# Altium PCB BGV1.0-pin.PcbDoc
Units mil, origin at the board's own origin, x right, y up, seen from the top; angles counter-clockwise.
Board outline 5620 x 4250 mil, 2 copper layers (Top Layer, Bottom Layer); 120 components, 16 nets, 420 pads, 408 vias.
Unrouted connection lines stored in the file: 80.
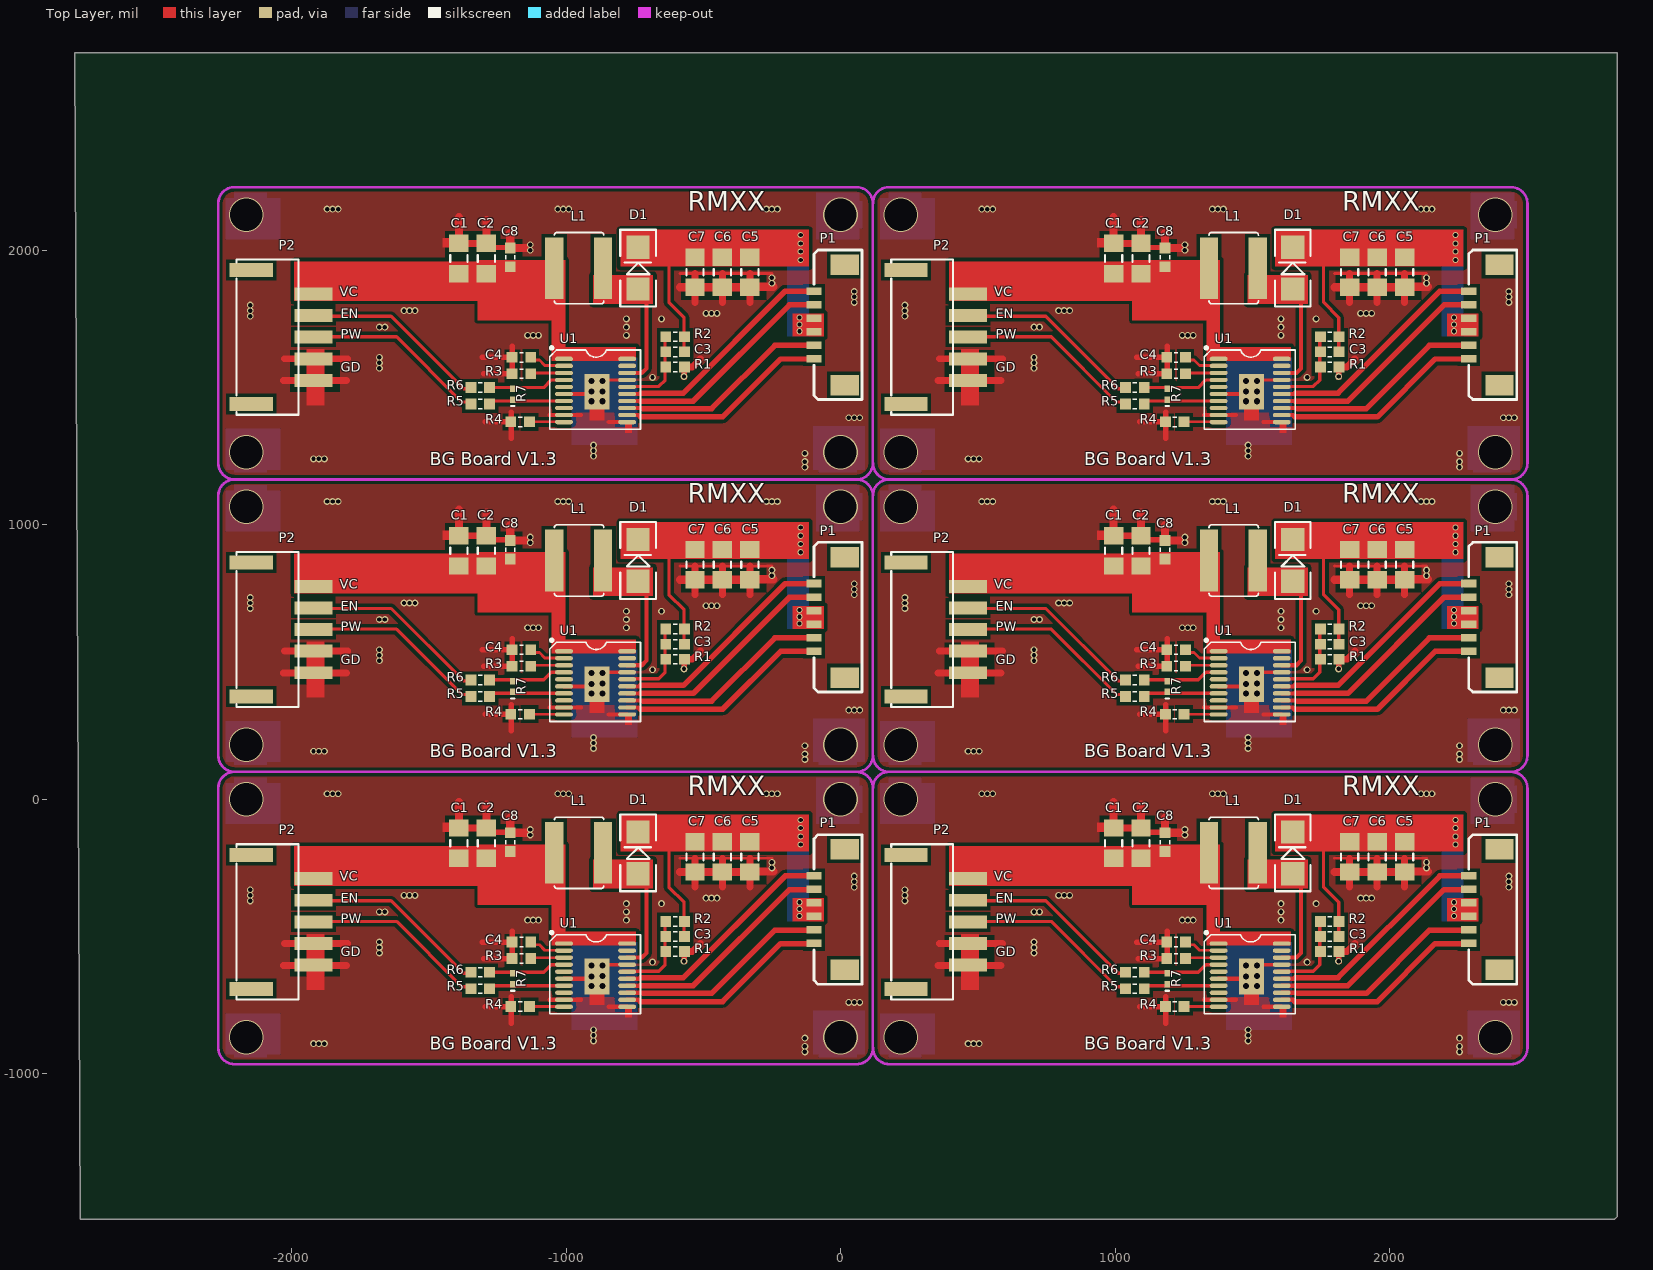
[diagram p0: Top Layer view]
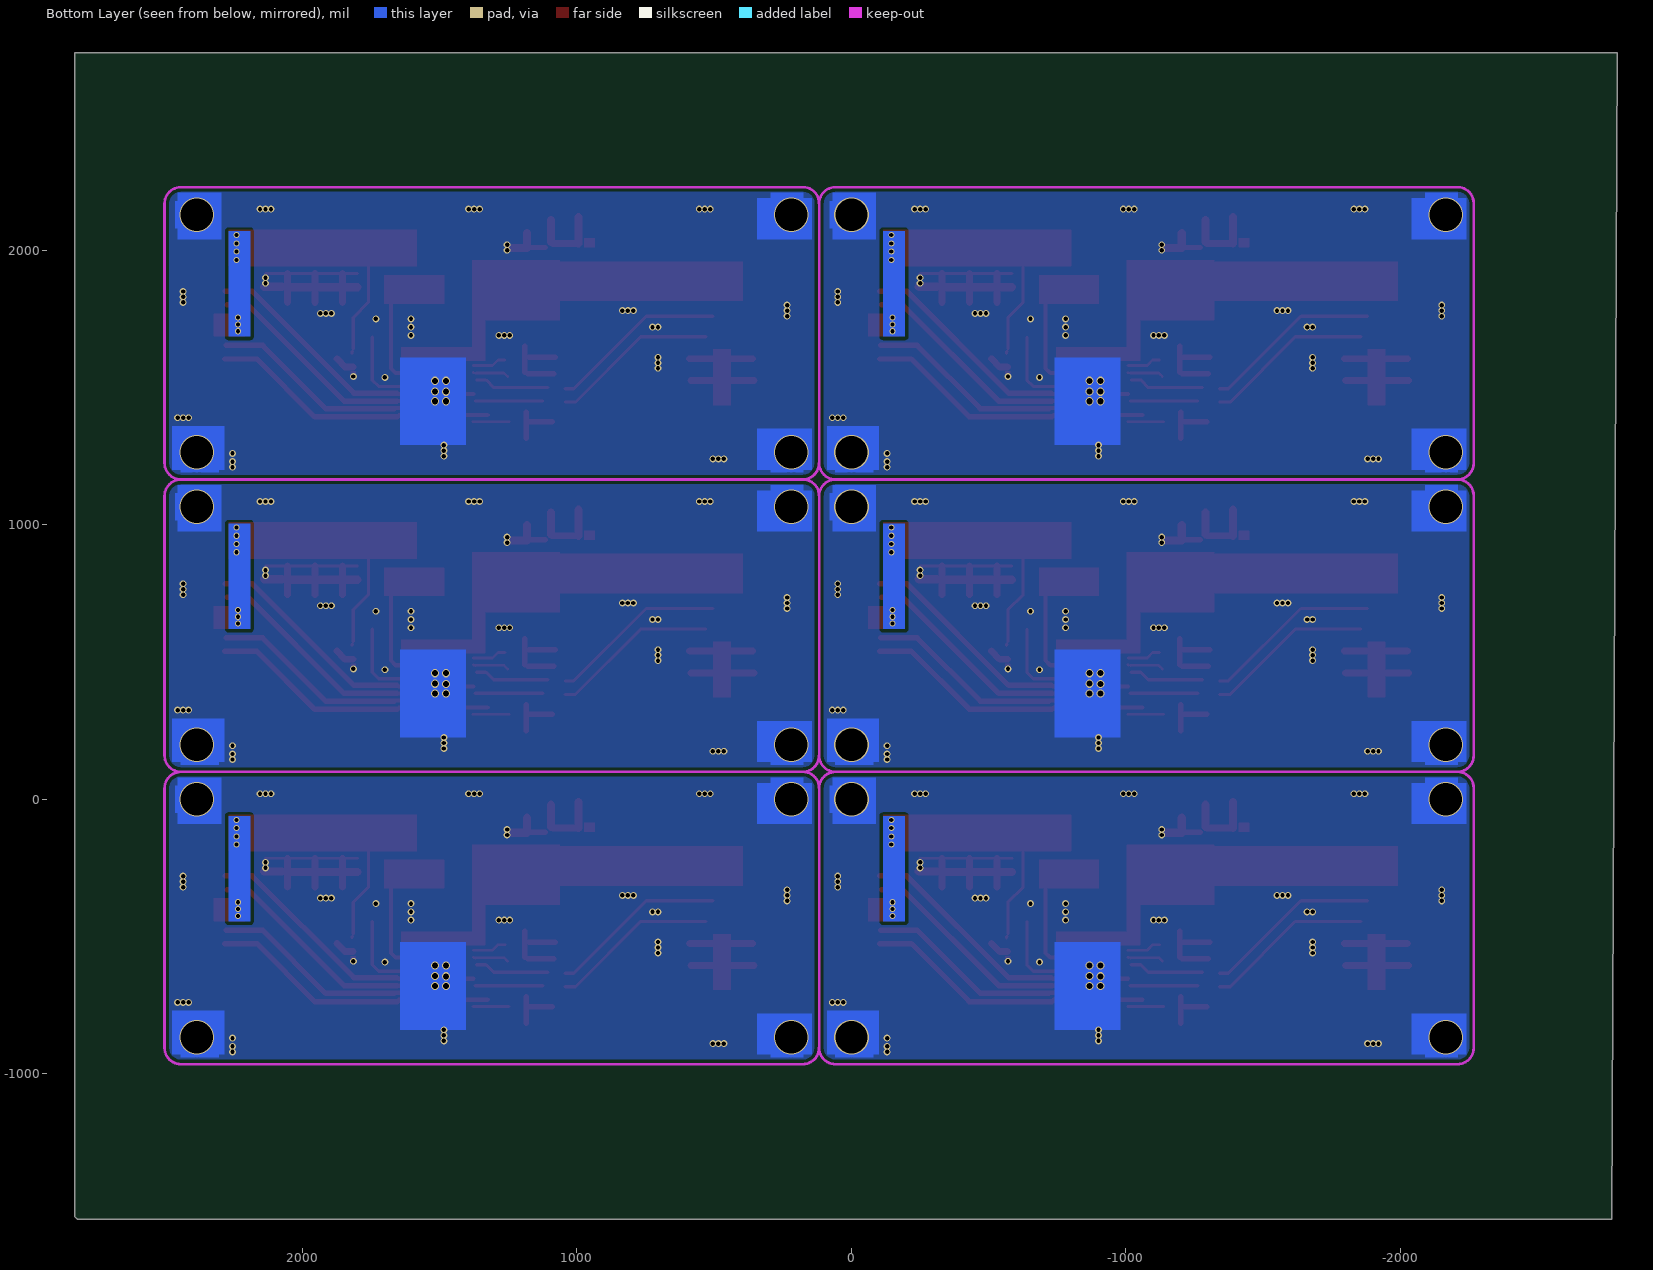
[diagram p1: Bottom Layer view, seen from below]

## Layer stack, top to bottom
Top Layer: signal copper 1.4
Dielectric: dielectric 12.6, FR-4, Dk 4.8
Bottom Layer: signal copper 1.4

## Board outline
-2790,2720 2830,2720 2830,-1520 2820,-1530 -2770,-1530

## Design rules (kind name [scope] priority, off if disabled: settings)
Clearance [All] p1 off: gap=12
ComponentClearance [All] p1: gap=5 collisioncheckmode=3 verticalgap=5
PolygonConnect [All] p1: connectstyle=Direct reliefconductorwidth=10 reliefentries=4 polygonreliefangle="90 Angle"
RoutingVias [All] p1: holewidth=12 width=22 viastyle="Through Hole" minholewidth=8 minwidth=10 maxholewidth=200 maxwidth=150
SolderMaskExpansion [All] p1: expansion=4
TestPointUsage [All] p1: valid=0 allowmultiple=FALSE
Testpoint [(IsPad And (OnTopLayer Or OnBottomLayer))] p1: side=3 testpointundercomponent=TRUE minsize=40 maxsize=100 preferedsize=60 minholesize=0 maxholesize=40 preferedholesize=32 testpointgrid=1 style=297 order=0-112345678
Width [All] p1: maxlimit=100 minlimit=10 preferedwidth=10 minimp=50.000000 maximp=50.000000 favimp=50.000000
18 further rules are at their usual default settings.

## Classes and differential pairs
component class BGV1.0: C1 C2 C3 C4 C5 C6 C7 C8 D1 L1 P1 P2 R1 R2 R3 R4 R5 R6 R7 U1

## Components (designator, comment, footprint, x,y, rotation, side; value= is the part's Value field where it differs from the comment)
C1 "Cap" 3216[1206] -1390,1970 r270 top
C1 "Cap" 3216[1206] 994.72,1970 r270 top
C1 "Cap" 3216[1206] -1390,905 r270 top
C1 "Cap" 3216[1206] 994.72,905 r270 top
C1 "Cap" 3216[1206] 994.72,-160 r270 top
C1 "Cap" 3216[1206] -1390,-160 r270 top
C2 "Cap" 3216[1206] -1290,1970 r270 top
C2 "Cap" 3216[1206] 1094.72,1970 r270 top
C2 "Cap" 3216[1206] -1290,905 r270 top
C2 "Cap" 3216[1206] 1094.72,905 r270 top
C2 "Cap" 3216[1206] 1094.72,-160 r270 top
C2 "Cap" 3216[1206] -1290,-160 r270 top
C3 "Cap" 0603 -602.28,1630 r0 top
C3 "Cap" 0603 1782.43,1630 r0 top
C3 "Cap" 0603 -602.28,565 r0 top
C3 "Cap" 0603 1782.43,565 r0 top
C3 "Cap" 0603 1782.43,-500 r0 top
C3 "Cap" 0603 -602.28,-500 r0 top
C4 "Cap" 0603 -1162.28,1610 r0 top
C4 "Cap" 0603 1222.43,1610 r0 top
C4 "Cap" 0603 -1162.28,545 r0 top
C4 "Cap" 0603 1222.43,545 r0 top
C4 "Cap" 0603 1222.43,-520 r0 top
C4 "Cap" 0603 -1162.28,-520 r0 top
C5 "Cap" 3216[1206] -330,1920 r90 top
C5 "Cap" 3216[1206] 2054.72,1920 r90 top
C5 "Cap" 3216[1206] -330,855 r90 top
C5 "Cap" 3216[1206] 2054.72,855 r90 top
C5 "Cap" 3216[1206] 2054.72,-210 r90 top
C5 "Cap" 3216[1206] -330,-210 r90 top
C6 "Cap" 3216[1206] -430,1920 r90 top
C6 "Cap" 3216[1206] 1954.72,1920 r90 top
C6 "Cap" 3216[1206] -430,855 r90 top
C6 "Cap" 3216[1206] 1954.72,855 r90 top
C6 "Cap" 3216[1206] 1954.72,-210 r90 top
C6 "Cap" 3216[1206] -430,-210 r90 top
C7 "Cap" 3216[1206] -530,1920 r90 top
C7 "Cap" 3216[1206] 1854.72,1920 r90 top
C7 "Cap" 3216[1206] -530,855 r90 top
C7 "Cap" 3216[1206] 1854.72,855 r90 top
C7 "Cap" 3216[1206] 1854.72,-210 r90 top
C7 "Cap" 3216[1206] -530,-210 r90 top
C8 "Cap" 0603 -1203,1974 r90 top
C8 "Cap" 0603 1181.72,1974 r90 top
C8 "Cap" 0603 -1203,909 r90 top
C8 "Cap" 0603 1181.72,909 r90 top
C8 "Cap" 0603 1181.72,-156 r90 top
C8 "Cap" 0603 -1203,-156 r90 top
D1 "Diode 1N4448" SMA -737.28,1935 r90 top
D1 "Diode 1N4448" SMA 1647.43,1935 r90 top
D1 "Diode 1N4448" SMA -737.28,870 r90 top
D1 "Diode 1N4448" SMA 1647.43,870 r90 top
D1 "Diode 1N4448" SMA 1647.43,-195 r90 top
D1 "Diode 1N4448" SMA -737.28,-195 r90 top
L1 "Inductor" L-6045 -1042.28,1935 r0 top
L1 "Inductor" L-6045 1342.43,1935 r0 top
L1 "Inductor" L-6045 -1042.28,870 r0 top
L1 "Inductor" L-6045 1342.43,870 r0 top
L1 "Inductor" L-6045 1342.43,-195 r0 top
L1 "Inductor" L-6045 -1042.28,-195 r0 top
P1 "Header 6" 1.25MM-6P -96.28,1851 r90 top
P1 "Header 6" 1.25MM-6P 2288.43,1851 r90 top
P1 "Header 6" 1.25MM-6P -96.28,786 r90 top
P1 "Header 6" 1.25MM-6P 2288.43,786 r90 top
P1 "Header 6" 1.25MM-6P 2288.43,-279 r90 top
P1 "Header 6" 1.25MM-6P -96.28,-279 r90 top
P2 "Header 5" PH2.0-5P-SMT -1920,1526 r90 top
P2 "Header 5" PH2.0-5P-SMT 464.72,1526 r90 top
P2 "Header 5" PH2.0-5P-SMT -1920,461 r90 top
P2 "Header 5" PH2.0-5P-SMT 464.72,461 r90 top
P2 "Header 5" PH2.0-5P-SMT 464.72,-604 r90 top
P2 "Header 5" PH2.0-5P-SMT -1920,-604 r90 top
R1 "Res1" 0603 -602.28,1575 r180 top
R1 "Res1" 0603 1782.43,1575 r180 top
R1 "Res1" 0603 -602.28,510 r180 top
R1 "Res1" 0603 1782.43,510 r180 top
R1 "Res1" 0603 1782.43,-555 r180 top
R1 "Res1" 0603 -602.28,-555 r180 top
R2 "Res1" 0603 -602.28,1685 r0 top
R2 "Res1" 0603 1782.43,1685 r0 top
R2 "Res1" 0603 -602.28,620 r0 top
R2 "Res1" 0603 1782.43,620 r0 top
R2 "Res1" 0603 1782.43,-445 r0 top
R2 "Res1" 0603 -602.28,-445 r0 top
R3 "Res1" 0603 -1162.28,1550 r0 top
R3 "Res1" 0603 1222.43,1550 r0 top
R3 "Res1" 0603 -1162.28,485 r0 top
R3 "Res1" 0603 1222.43,485 r0 top
R3 "Res1" 0603 1222.43,-580 r0 top
R3 "Res1" 0603 -1162.28,-580 r0 top
R4 "Res1" 0603 -1167.28,1375 r180 top
R4 "Res1" 0603 1217.43,1375 r180 top
R4 "Res1" 0603 -1167.28,310 r180 top
R4 "Res1" 0603 1217.43,310 r180 top
R4 "Res1" 0603 1217.43,-755 r180 top
R4 "Res1" 0603 -1167.28,-755 r180 top
R5 "Res1" 0603 -1312.28,1440 r180 top
R5 "Res1" 0603 1072.43,1440 r180 top
R5 "Res1" 0603 -1312.28,375 r180 top
R5 "Res1" 0603 1072.43,375 r180 top
R5 "Res1" 0603 1072.43,-690 r180 top
R5 "Res1" 0603 -1312.28,-690 r180 top
R6 "Res1" 0603 -1312.28,1500 r180 top
R6 "Res1" 0603 1072.43,1500 r180 top
R6 "Res1" 0603 -1312.28,435 r180 top
R6 "Res1" 0603 1072.43,435 r180 top
R6 "Res1" 0603 1072.43,-630 r180 top
R6 "Res1" 0603 -1312.28,-630 r180 top
R7 "Res1" 0402-A -1194,1476 r90 top
R7 "Res1" 0402-A 1190.72,1476 r90 top
R7 "Res1" 0402-A -1194,411 r90 top
R7 "Res1" 0402-A 1190.72,411 r90 top
R7 "Res1" 0402-A 1190.72,-654 r90 top
R7 "Res1" 0402-A -1194,-654 r90 top
U1 "TPS61194" ? -1007.28,1604.41 r0 top
U1 "TPS61194" ? 1377.43,1604.41 r0 top
U1 "TPS61194" ? -1007.28,539.41 r0 top
U1 "TPS61194" ? 1377.43,539.41 r0 top
U1 "TPS61194" ? 1377.43,-525.59 r0 top
U1 "TPS61194" ? -1007.28,-525.59 r0 top

## Footprints (in the part's own frame and the unit in brackets; to place one, negate y for a bottom-side part, rotate by r counter-clockwise, add the part's x,y. Pads: shape width x height; smd on the part's side, far side on the other; paste and mask are expansions set on the pad)
1.25MM-6P [mm]
  rect 1.9x2.6 smd: 0(-8.7,-2.835) 0(2.45,-2.835)
  rect 0.7x1.4 smd: 1(-6.25,0) 2(-5,0) 3(-3.75,0) 4(-2.5,0) 5(-1.25,0) 6(0,0)
  silkscreen extent -10.03,-4.45 3.81,0
0402-A [mm] "Chip Inductor, Body 1.0x0.5mm, IPC High Density"
  rect 0.6x0.5 smd: 1(-0.5,0) 2(0.5,0)
  silkscreen extent -1.1,-0.15 -1.1,0.15, body extent -0.55,-0.3 0.55,0.3, height 0.55
0603 [mm]
  rect 1x1 smd: 1(-0.864,0) 2(0.864,0)
  silkscreen extent -0.18,-0.43 0.18,0.43
3216[1206] [mm] "Chip Resistor; Body 3.2 x 1.6 mm (LxW typ)"
  rect 1.6x1.8 smd: 1(-1.4,0) 2(1.4,0)
  silkscreen extent -0.3,-0.8 0.3,0.8
L-6045 [mm]
  rect 1.7x5.7 smd: 1(0,0) 2(4.5,0)
  silkscreen extent 0,-3.3 4.57,3.3
PH2.0-5P-SMT [mm]
  rect 1.3x4 smd: 0(-2.2,5.75) 0(10.2,5.75)
  rect 1.2x3.5 smd: 1(0,0) 2(2,0) 3(4,0) 4(6,0) 5(8,0)
  silkscreen extent -3.18,1.4 11.18,7.11
SMA [mm] "Molded Diode, 2-Leads, Body 4.3x2.7mm, IPC Medium Density"
  rect 2.15x2.15 smd: 1(-1.93,0) 2(1.93,0)
  silkscreen extent -3.56,-1.65 3.56,1.65, body extent -2.28,-1.42 2.29,1.42, height 2.95
? [mm]
  oval 1.65x0.4 smd: 1(0,0) 2(0,-0.65) 3(0,-1.3) 4(0,-1.95) 5(0,-2.6) 6(0,-3.25) 7(0,-3.9) 8(0,-4.55) 9(0,-5.2) 10(0,-5.85) 11(5.842,-5.85) 12(5.842,-5.2) 13(5.842,-4.55) 14(5.842,-3.9) 15(5.842,-3.25) 16(5.842,-2.6) 17(5.842,-1.95) 18(5.842,-1.3) 19(5.842,-0.65) 20(5.842,0)
  rect 2.286x3.302 smd: 21(3.048,-3.048)
  silkscreen extent -1.32,-6.5 7.07,1.14, body extent 0.64,-6.2 5.08,0.28, height 2.65

## Part data
C1 C1 C1 C1 C1 C1 C2 C2 C2 C2 C2 C2 C3 C3 C3 C3 C3 C3 C4 C4 C4 C4 C4 C4 C5 C5 C5 C5 C5 C5 C6 C6 C6 C6 C6 C6 C7 C7 C7 C7 C7 C7 C8 C8 C8 C8 C8 C8: "Capacitor"
D1 D1 D1 D1 D1 D1: "High Conductance Fast Diode"
P1 P1 P1 P1 P1 P1: "Header, 6-Pin"
P2 P2 P2 P2 P2 P2: "Header, 5-Pin"
R1 R1 R1 R1 R1 R1 R2 R2 R2 R2 R2 R2 R3 R3 R3 R3 R3 R3 R4 R4 R4 R4 R4 R4 R5 R5 R5 R5 R5 R5 R6 R6 R6 R6 R6 R6 R7 R7 R7 R7 R7 R7: "Resistor"

## Via types
v1: diameter 25, hole 16, Top Layer to Bottom Layer, 306 vias
v2: diameter 22, hole 15, Top Layer to Bottom Layer, 42 vias
v3: diameter 30, hole 22, Top Layer to Bottom Layer, 36 vias
v4: diameter 125.98, hole 118.11, Top Layer to Bottom Layer, 24 vias

## Nets (pads, with @x,y where several pads share a name; then routed paths per layer and width w, separated by ;. In a path a pad name is that pad's centre, name@x,y a point inside that pad or via, vN(x,y) a via of type N, cw(c..) or ccw(c..) an arc to the next point about the centre after c; other vN are vias at no path point)
EN: P2.4 R6.2 | length 3888.4
  Top Layer w12: P2.4@-1880,-370 -1637.28,-370 -1373.28,-634 R6.2@-1341.28,-634 ; P2.4@-1880,695 -1637.28,695 -1373.28,431 R6.2@-1341.28,431 ; P2.4@-1880,1760 -1637.28,1760 -1373.28,1496 R6.2@-1341.28,1496 ; P2.4@504.72,-370 747.43,-370 1011.43,-634 R6.2@1043.43,-634 ; P2.4@504.72,695 747.43,695 1011.43,431 R6.2@1043.43,431 ; P2.4@504.72,1760 747.43,1760 1011.43,1496 R6.2@1043.43,1496
GND: C1.1 C2.1 C4.1 C5.1 C6.1 C7.1 C8.2 P2.1 P2.2 R1.1 R3.1 R4.2 U1.6 U1.9 U1.11 U1.17 U1.21 | length 16606
  Top Layer w10: -585,-215 -530,-215 -250,-215 ; -585,850 -530,850 -250,850 ; -585,1915 -530,1915 -250,1915 ; 1799.72,-215 1854.72,-215 2134.72,-215 ; 1799.72,850 1854.72,850 2134.72,850 ; 1799.72,1915 1854.72,1915 2134.72,1915
  Top Layer w12: U1.21@-860,-602 -859.64,-602.36 U1.17@-777.28,-602.36 ; U1.21@-860,463 -859.64,462.64 U1.17@-777.28,462.64 ; U1.21@-860,1528 -859.64,1527.64 U1.17@-777.28,1527.64 ; U1.21@1524.72,-602 1525.08,-602.36 U1.17@1607.43,-602.36 ; U1.21@1524.72,463 1525.08,462.64 U1.17@1607.43,462.64 ; U1.21@1524.72,1528 1525.08,1527.64 U1.17@1607.43,1527.64
  Top Layer w15: -1059.68,-730.32 -1007.28,-730.32 -945.32,-730.32 -945,-730 ; -1059.68,334.68 -1007.28,334.68 -945.32,334.68 -945,335 ; -1059.68,1399.69 -1007.28,1399.69 -945.32,1399.69 -945,1400 ; U1.6@-1007.28,-653.54 U1.21@-924.83,-653.54 ; U1.6@-1007.28,411.46 U1.21@-924.83,411.46 ; U1.6@-1007.28,1476.46 U1.21@-924.83,1476.46 ; -844.09,-755.91 U1.11@-777.28,-755.91 ; -844.09,309.09 U1.11@-777.28,309.09 ; -844.09,1374.09 U1.11@-777.28,1374.09 ; 1325.03,-730.32 1377.43,-730.32 1439.4,-730.32 1439.72,-730 ; 1325.03,334.68 1377.43,334.68 1439.4,334.68 1439.72,335 ; 1325.03,1399.69 1377.43,1399.69 1439.4,1399.69 1439.72,1400 ; U1.6@1377.43,-653.54 U1.21@1459.89,-653.54 ; U1.6@1377.43,411.46 U1.21@1459.89,411.46 ; U1.6@1377.43,1476.46 U1.21@1459.89,1476.46 ; 1540.62,-755.91 U1.11@1607.43,-755.91 ; 1540.62,309.09 U1.11@1607.43,309.09 ; 1540.62,1374.09 U1.11@1607.43,1374.09
  Top Layer w20: -1305,-520 C4.1@-1210,-520 ; -1305,545 C4.1@-1210,545 ; -1305,1610 C4.1@-1210,1610 ; -1300,-580 R3.1@-1205,-580 ; -1300,485 R3.1@-1205,485 ; -1300,1550 R3.1@-1205,1550 ; -1295,-755 R4.2@-1200,-755 ; -1295,310 R4.2@-1200,310 ; -1295,1375 R4.2@-1200,1375 ; C2.1@-1270,-119.88 C8.2@-1215,-119.88 ; C2.1@-1270,945.12 C8.2@-1215,945.12 ; C2.1@-1270,2010.12 C8.2@-1215,2010.12 ; -1200,-815 -1200,-720 ; -1200,250 -1200,345 ; -1200,1315 -1200,1410 ; R3.1@-1195,-575 -1195,-480 ; R3.1@-1195,490 -1195,585 ; R3.1@-1195,1555 -1195,1650 ; 1079.72,-520 C4.1@1174.72,-520 ; 1079.72,545 C4.1@1174.72,545 ; 1079.72,1610 C4.1@1174.72,1610 ; 1084.72,-580 R3.1@1179.72,-580 ; 1084.72,485 R3.1@1179.72,485 ; 1084.72,1550 R3.1@1179.72,1550 ; 1089.72,-755 R4.2@1184.72,-755 ; 1089.72,310 R4.2@1184.72,310 ; 1089.72,1375 R4.2@1184.72,1375 ; C2.1@1114.72,-119.88 C8.2@1169.72,-119.88 ; C2.1@1114.72,945.12 C8.2@1169.72,945.12 ; C2.1@1114.72,2010.12 C8.2@1169.72,2010.12 ; 1184.72,-815 1184.72,-720 ; 1184.72,250 1184.72,345 ; 1184.72,1315 1184.72,1410 ; R3.1@1189.72,-575 1189.72,-480 ; R3.1@1189.72,490 1189.72,585 ; R3.1@1189.72,1555 1189.72,1650
  Top Layer w25: -2030,-605 -1800,-605 ; -2030,460 -1800,460 ; -2030,1525 -1800,1525 ; -2025,-525 -1795,-525 ; -2025,540 -1795,540 ; -2025,1605 -1795,1605 ; C1.1@-1390,-105 C2.1@-1295,-105 ; C1.1@-1390,960 C2.1@-1295,960 ; C1.1@-1390,2025 C2.1@-1295,2025 ; R1.1@-568.28,-555 -540,-555 -510,-525 ; R1.1@-568.28,510 -540,510 -510,540 ; R1.1@-568.28,1575 -540,1575 -510,1605 ; -530,-320 -530,-215 ; -530,745 -530,850 ; -530,1810 -530,1915 ; -430,-320 -430,-215 ; -430,745 -430,850 ; -430,1810 -430,1915 ; -330,-320 -330,-215 ; -330,745 -330,850 ; -330,1810 -330,1915 ; 354.72,-605 584.72,-605 ; 354.72,460 584.72,460 ; 354.72,1525 584.72,1525 ; 359.72,-525 589.72,-525 ; 359.72,540 589.72,540 ; 359.72,1605 589.72,1605 ; C1.1@994.72,-105 C2.1@1089.72,-105 ; C1.1@994.72,960 C2.1@1089.72,960 ; C1.1@994.72,2025 C2.1@1089.72,2025 ; R1.1@1816.43,-555 1844.72,-555 1874.72,-525 ; R1.1@1816.43,510 1844.72,510 1874.72,540 ; R1.1@1816.43,1575 1844.72,1575 1874.72,1605 ; 1854.72,-320 1854.72,-215 ; 1854.72,745 1854.72,850 ; 1854.72,1810 1854.72,1915 ; 1954.72,-320 1954.72,-215 ; 1954.72,745 1954.72,850 ; 1954.72,1810 1954.72,1915 ; 2054.72,-320 2054.72,-215 ; 2054.72,745 2054.72,850 ; 2054.72,1810 2054.72,1915
  Top Layer w30: C1.1@-1390,-105 -1390,-104.88 -1390,-10 ; C1.1@-1390,960 -1390,960.12 -1390,1055 ; C1.1@-1390,2025 -1390,2025.12 -1390,2120 ; C2.1@-1290,-100 -1290,-20 ; C2.1@-1290,965 -1290,1045 ; C2.1@-1290,2030 -1290,2110 ; -1203,-67 -1203,-122 v1@-1138,-122 ; -1203,998 -1203,943 v1@-1138,943 ; -1203,2063 -1203,2008 v1@-1138,2008 ; -585,-265 C5.1@-330,-265 ; -585,800 C5.1@-330,800 ; -585,1865 C5.1@-330,1865 ; C5.1@-310,-263.14 -245,-263.14 ; C5.1@-310,801.86 -245,801.86 ; C5.1@-310,1866.86 -245,1866.86 ; C1.1@994.72,-105 994.72,-104.88 994.72,-10 ; C1.1@994.72,960 994.72,960.12 994.72,1055 ; C1.1@994.72,2025 994.72,2025.12 994.72,2120 ; C2.1@1094.72,-100 1094.72,-20 ; C2.1@1094.72,965 1094.72,1045 ; C2.1@1094.72,2030 1094.72,2110 ; 1181.72,-67 1181.72,-122 v1@1246.72,-122 ; 1181.72,998 1181.72,943 v1@1246.72,943 ; 1181.72,2063 1181.72,2008 v1@1246.72,2008 ; 1799.72,-265 C5.1@2054.72,-265 ; 1799.72,800 C5.1@2054.72,800 ; 1799.72,1865 C5.1@2054.72,1865 ; C5.1@2074.72,-263.14 2139.72,-263.14 ; C5.1@2074.72,801.86 2139.72,801.86 ; C5.1@2074.72,1866.86 2139.72,1866.86
  other v1: -130,-920 2254.72,-920 -130,-900 2254.72,-900 -1920,-890 -1900,-890 -1880,-890 464.72,-890 484.72,-890 504.72,-890 -900,-880 1484.72,-880 -130,-870 2254.72,-870 -900,-860 1484.72,-860 -900,-840 1484.72,-840 30,-740 50,-740 70,-740 2414.72,-740 2434.72,-740 2454.72,-740 -685,-593 1699.72,-593 -570,-590 1814.72,-590 -1680,-560 704.72,-560 -1680,-540 704.72,-540 -1680,-520 704.72,-520 -1140,-440 -1120,-440 -1100,-440 -780,-440 1244.72,-440 1264.72,-440 1284.72,-440 1604.72,-440 -1680,-410 -1660,-410 -780,-410 704.72,-410 724.72,-410 1604.72,-410 -780,-380 -652,-380 1604.72,-380 1732.72,-380 -2150,-370 234.72,-370 -490,-360 -470,-360 -450,-360 1894.72,-360 1914.72,-360 1934.72,-360 -2150,-350 -1590,-350 -1570,-350 -1550,-350 234.72,-350 794.72,-350 814.72,-350 834.72,-350 -2150,-330 234.72,-330 50,-320 2434.72,-320 50,-300 2434.72,-300 50,-280 2434.72,-280 -250,-250 2134.72,-250 -250,-230 2134.72,-230 -1130,-130 1254.72,-130 -1130,-110 1254.72,-110 -1870,20 -1850,20 -1830,20 -1030,20 -1010,20 -990,20 -270,20 -250,20 -230,20 514.72,20 534.72,20 554.72,20 1354.72,20 1374.72,20 1394.72,20 2114.72,20 2134.72,20 2154.72,20 -130,145 2254.72,145 -130,165 2254.72,165 -1920,175 -1900,175 -1880,175 464.72,175 484.72,175 504.72,175 -900,185 1484.72,185 -130,195 2254.72,195 -900,205 1484.72,205 -900,225 1484.72,225 30,325 50,325 70,325 2414.72,325 2434.72,325 2454.72,325 -685,472 1699.72,472 -570,475 1814.72,475 -1680,505 704.72,505 -1680,525 704.72,525 -1680,545 704.72,545 -1140,625 -1120,625 -1100,625 -780,625 1244.72,625 1264.72,625 1284.72,625 1604.72,625 -1680,655 -1660,655 -780,655 704.72,655 724.72,655 1604.72,655 -780,685 -652,685 1604.72,685 1732.72,685 -2150,695 234.72,695 -490,705 -470,705 -450,705 1894.72,705 1914.72,705 1934.72,705 -2150,715 -1590,715 -1570,715 -1550,715 234.72,715 794.72,715 814.72,715 834.72,715 -2150,735 234.72,735 50,745 2434.72,745 50,765 2434.72,765 50,785 2434.72,785 -250,815 2134.72,815 -250,835 2134.72,835 -1130,935 1254.72,935 -1130,955 1254.72,955 -1870,1085 -1850,1085 -1830,1085 -1030,1085 -1010,1085 -990,1085 -270,1085 -250,1085 -230,1085 514.72,1085 534.72,1085 554.72,1085 1354.72,1085 1374.72,1085 1394.72,1085 2114.72,1085 2134.72,1085 2154.72,1085 -130,1210 2254.72,1210 -130,1230 2254.72,1230 -1920,1240 -1900,1240 -1880,1240 464.72,1240 484.72,1240 504.72,1240 -900,1250 1484.72,1250 -130,1260 2254.72,1260 -900,1270 1484.72,1270 -900,1290 1484.72,1290 30,1390 50,1390 70,1390 2414.72,1390 2434.72,1390 2454.72,1390 -685,1537 1699.72,1537 -570,1540 1814.72,1540 -1680,1570 704.72,1570 -1680,1590 704.72,1590 -1680,1610 704.72,1610 -1140,1690 -1120,1690 -1100,1690 -780,1690 1244.72,1690 1264.72,1690 1284.72,1690 1604.72,1690 -1680,1720 -1660,1720 -780,1720 704.72,1720 724.72,1720 1604.72,1720 -780,1750 -652,1750 1604.72,1750 1732.72,1750 -2150,1760 234.72,1760 -490,1770 -470,1770 -450,1770 1894.72,1770 1914.72,1770 1934.72,1770 -2150,1780 -1590,1780 -1570,1780 -1550,1780 234.72,1780 794.72,1780 814.72,1780 834.72,1780 -2150,1800 234.72,1800 50,1810 2434.72,1810 50,1830 2434.72,1830 50,1850 2434.72,1850 -250,1880 2134.72,1880 -250,1900 2134.72,1900 -1130,2000 1254.72,2000 -1130,2020 1254.72,2020 -1870,2150 -1850,2150 -1830,2150 -1030,2150 -1010,2150 -990,2150 -270,2150 -250,2150 -230,2150 514.72,2150 534.72,2150 554.72,2150 1354.72,2150 1374.72,2150 1394.72,2150 2114.72,2150 2134.72,2150 2154.72,2150
  other v3: -907.28,-680 -867.28,-680 1477.43,-680 1517.43,-680 -907.28,-645 1477.43,-645 -867.28,-644 1517.43,-644 -907.28,-605.59 -867.28,-605.59 1477.43,-605.59 1517.43,-605.59 -907.28,385 -867.28,385 1477.43,385 1517.43,385 -907.28,420 1477.43,420 -867.28,421 1517.43,421 -907.28,459.41 -867.28,459.41 1477.43,459.41 1517.43,459.41 -907.28,1450 -867.28,1450 1477.43,1450 1517.43,1450 -907.28,1485 1477.43,1485 -867.28,1486 1517.43,1486 -907.28,1524.41 -867.28,1524.41 1477.43,1524.41 1517.43,1524.41
  other v4: -2165.35,-866.14 0,-866.14 219.36,-866.14 2384.72,-866.14 -2165.35,0 0,0 219.36,0 2384.72,0 -2165.35,198.86 0,198.86 219.36,198.86 2384.72,198.86 -2165.35,1065 0,1065 219.36,1065 2384.72,1065 -2165.35,1263.86 0,1263.86 219.36,1263.86 2384.72,1263.86 -2165.35,2130 0,2130 219.36,2130 2384.72,2130
NetC3_1: C3.1 R1.2 R2.1 U1.16 | length 1923
  Top Layer w12: U1.16@-793.28,-625.95 -662.24,-625.95 -639.28,-603 R2.1@-639.28,-446 ; U1.16@-793.28,439.05 -662.24,439.05 -639.28,462 R2.1@-639.28,619 ; U1.16@-793.28,1504.05 -662.24,1504.05 -639.28,1527 R2.1@-639.28,1684 ; U1.16@1591.43,-625.95 1722.48,-625.95 1745.43,-603 R2.1@1745.43,-446 ; U1.16@1591.43,439.05 1722.48,439.05 1745.43,462 R2.1@1745.43,619 ; U1.16@1591.43,1504.05 1722.48,1504.05 1745.43,1527 R2.1@1745.43,1684
NetC3_2: C3.2 C5.2 C6.2 C7.2 D1.2 P1.3 P1.4 R2.2 | length 2058.7
  Top Layer w12: -625,-175 -625,-320 -570,-375 C3.2@-570,-490 ; -625,890 -625,745 -570,690 C3.2@-570,575 ; -625,1955 -625,1810 -570,1755 C3.2@-570,1640 ; C3.2@-565.58,-499.7 C3.2@-565,-505 ; C3.2@-565.58,565.3 C3.2@-565,560 ; C3.2@-565.58,1630.3 C3.2@-565,1625 ; 1759.72,-175 1759.72,-320 1814.72,-375 C3.2@1814.72,-490 ; 1759.72,890 1759.72,745 1814.72,690 C3.2@1814.72,575 ; 1759.72,1955 1759.72,1810 1814.72,1755 C3.2@1814.72,1640 ; C3.2@1819.14,-499.7 C3.2@1819.72,-505 ; C3.2@1819.14,565.3 C3.2@1819.72,560 ; C3.2@1819.14,1630.3 C3.2@1819.72,1625
  other v2: -150,-425 2234.72,-425 -150,-400 2234.72,-400 -150,-375 2234.72,-375 -145,-165 2239.72,-165 -145,-135 2239.72,-135 -145,-105 2239.72,-105 -145,-75 2239.72,-75 -150,640 2234.72,640 -150,665 2234.72,665 -150,690 2234.72,690 -145,900 2239.72,900 -145,930 2239.72,930 -145,960 2239.72,960 -145,990 2239.72,990 -150,1705 2234.72,1705 -150,1730 2234.72,1730 -150,1755 2234.72,1755 -145,1965 2239.72,1965 -145,1995 2239.72,1995 -145,2025 2239.72,2025 -145,2055 2239.72,2055
NetC4_2: C4.2 U1.2 | length 739.7
  Top Layer w10: C4.2@-1122.28,-530 -1097.28,-530 -1077.28,-550 U1.2@-1007.28,-550 ; C4.2@-1122.28,535 -1097.28,535 -1077.28,515 U1.2@-1007.28,515 ; C4.2@-1122.28,1600 -1097.28,1600 -1077.28,1580 U1.2@-1007.28,1580 ; C4.2@1262.43,-530 1287.43,-530 1307.43,-550 U1.2@1377.43,-550 ; C4.2@1262.43,535 1287.43,535 1307.43,515 U1.2@1377.43,515 ; C4.2@1262.43,1600 1287.43,1600 1307.43,1580 U1.2@1377.43,1580
NetD1_1: D1.1 L1.2 U1.18 | length 2064.1
  Top Layer w15: U1.18@-777.28,-576.77 -724.06,-576.77 -707.28,-560 -707.28,-300 D1.1@-702.28,-295 ; U1.18@-777.28,488.23 -724.06,488.23 -707.28,505 -707.28,765 D1.1@-702.28,770 ; U1.18@-777.28,1553.23 -724.06,1553.23 -707.28,1570 -707.28,1830 D1.1@-702.28,1835 ; U1.18@1607.43,-576.77 1660.66,-576.77 1677.43,-560 1677.43,-300 D1.1@1682.43,-295 ; U1.18@1607.43,488.23 1660.66,488.23 1677.43,505 1677.43,765 D1.1@1682.43,770 ; U1.18@1607.43,1553.23 1660.66,1553.23 1677.43,1570 1677.43,1830 D1.1@1682.43,1835
NetP1_1: P1.1 U1.12 | length 4590.9
  Top Layer w15: U1.12@-777.28,-730.32 -736.97,-730.32 -730.28,-737 ; U1.12@-777.28,334.68 -736.97,334.68 -730.28,328 ; U1.12@-777.28,1399.69 -736.97,1399.69 -730.28,1393 ; U1.12@1607.43,-730.32 1647.75,-730.32 1654.43,-737 ; U1.12@1607.43,334.68 1647.75,334.68 1654.43,328 ; U1.12@1607.43,1399.69 1647.75,1399.69 1654.43,1393
  Top Layer w20: -730.28,-737 -429.28,-737 -218.35,-526.06 P1.1@-102.28,-526.06 ; -730.28,328 -429.28,328 -218.35,538.94 P1.1@-102.28,538.94 ; -730.28,1393 -429.28,1393 -218.35,1603.94 P1.1@-102.28,1603.94 ; 1654.43,-737 1955.43,-737 2166.37,-526.06 P1.1@2282.43,-526.06 ; 1654.43,328 1955.43,328 2166.37,538.94 P1.1@2282.43,538.94 ; 1654.43,1393 1955.43,1393 2166.37,1603.94 P1.1@2282.43,1603.94
NetP1_2: P1.2 U1.13 | length 4584.3
  Top Layer w15: U1.13@-777.28,-704.72 -720.56,-704.72 ; U1.13@-777.28,360.28 -720.56,360.28 ; U1.13@-777.28,1425.28 -720.56,1425.28 ; U1.13@1607.43,-704.72 1664.16,-704.72 ; U1.13@1607.43,360.28 1664.16,360.28 ; U1.13@1607.43,1425.28 1664.16,1425.28
  Top Layer w20: -719.28,-707 -469.28,-707 -239.13,-476.85 P1.2@-107.28,-476.85 ; -719.28,358 -469.28,358 -239.13,588.15 P1.2@-107.28,588.15 ; -719.28,1423 -469.28,1423 -239.13,1653.15 P1.2@-107.28,1653.15 ; 1665.43,-707 1915.43,-707 2145.58,-476.85 P1.2@2277.43,-476.85 ; 1665.43,358 1915.43,358 2145.58,588.15 P1.2@2277.43,588.15 ; 1665.43,1423 1915.43,1423 2145.58,1653.15 P1.2@2277.43,1653.15
NetP1_5: P1.5 U1.14 | length 4872.2
  Top Layer w15: U1.14@-777.28,-679.13 -728.74,-679.13 ; U1.14@-777.28,385.87 -728.74,385.87 ; U1.14@-777.28,1450.87 -728.74,1450.87 ; U1.14@1607.43,-679.13 1655.98,-679.13 ; U1.14@1607.43,385.87 1655.98,385.87 ; U1.14@1607.43,1450.87 1655.98,1450.87
  Top Layer w20: -728.74,-679.13 -536.42,-679.13 -186.28,-329 P1.5@-110.28,-329 ; -728.74,385.87 -536.42,385.87 -186.28,736 P1.5@-110.28,736 ; -728.74,1450.87 -536.42,1450.87 -186.28,1801 P1.5@-110.28,1801 ; 1655.98,-679.13 1848.3,-679.13 2198.43,-329 P1.5@2274.43,-329 ; 1655.98,385.87 1848.3,385.87 2198.43,736 P1.5@2274.43,736 ; 1655.98,1450.87 1848.3,1450.87 2198.43,1801 P1.5@2274.43,1801
NetP1_6: P1.6 U1.15 | length 4973.8
  Top Layer w15: U1.15@-777.28,-653.54 -733.83,-653.54 -728.28,-648 ; U1.15@-777.28,411.46 -733.83,411.46 -728.28,417 ; U1.15@-777.28,1476.46 -733.83,1476.46 -728.28,1482 ; U1.15@1607.43,-653.54 1650.89,-653.54 1656.43,-648 ; U1.15@1607.43,411.46 1650.89,411.46 1656.43,417 ; U1.15@1607.43,1476.46 1650.89,1476.46 1656.43,1482
  Top Layer w20: -727.28,-650 -572.28,-650 -201.28,-279 P1.6@-103.28,-279 ; -727.28,415 -572.28,415 -201.28,786 P1.6@-103.28,786 ; -727.28,1480 -572.28,1480 -201.28,1851 P1.6@-103.28,1851 ; 1657.43,-650 1812.43,-650 2183.43,-279 P1.6@2281.43,-279 ; 1657.43,415 1812.43,415 2183.43,786 P1.6@2281.43,786 ; 1657.43,1480 1812.43,1480 2183.43,1851 P1.6@2281.43,1851
NetR3_2: R3.2 U1.3 | length 741
  Top Layer w10: R3.2@-1132.28,-590 -1119.28,-577 -1017,-577 U1.3@-1016,-578 ; R3.2@-1132.28,475 -1119.28,488 -1017,488 U1.3@-1016,487 ; R3.2@-1132.28,1540 -1119.28,1553 -1017,1553 U1.3@-1016,1552 ; U1.3@-1008.28,-576 U1.3@-1007.28,-575 ; U1.3@-1008.28,489 U1.3@-1007.28,490 ; U1.3@-1008.28,1554 U1.3@-1007.28,1555 ; R3.2@1252.43,-590 1265.43,-577 1367.72,-577 U1.3@1368.72,-578 ; R3.2@1252.43,475 1265.43,488 1367.72,488 U1.3@1368.72,487 ; R3.2@1252.43,1540 1265.43,1553 1367.72,1553 U1.3@1368.72,1552 ; U1.3@1376.43,-576 U1.3@1377.43,-575 ; U1.3@1376.43,489 U1.3@1377.43,490 ; U1.3@1376.43,1554 U1.3@1377.43,1555
NetR4_1: R4.1 U1.10 | length 786
  Top Layer w10: R4.1@-1137.28,-755 U1.10@-1006.28,-755 ; R4.1@-1137.28,310 U1.10@-1006.28,310 ; R4.1@-1137.28,1375 U1.10@-1006.28,1375 ; R4.1@1247.43,-755 U1.10@1378.43,-755 ; R4.1@1247.43,310 U1.10@1378.43,310 ; R4.1@1247.43,1375 U1.10@1378.43,1375
NetR5_1: R5.1 R7.1 U1.7 | length 1482
  Top Layer w12: R5.1@-1261.28,-679 U1.7@-1014.28,-679 ; R5.1@-1261.28,386 U1.7@-1014.28,386 ; R5.1@-1261.28,1451 U1.7@-1014.28,1451 ; R5.1@1123.43,-679 U1.7@1370.43,-679 ; R5.1@1123.43,386 U1.7@1370.43,386 ; R5.1@1123.43,1451 U1.7@1370.43,1451
NetR6_1: R6.1 R7.2 U1.4 | length 1622.7
  Top Layer w12: R6.1@-1278.28,-630 -1081.28,-630 -1053.65,-602.36 U1.4@-1019.28,-602.36 ; R6.1@-1278.28,435 -1081.28,435 -1053.65,462.64 U1.4@-1019.28,462.64 ; R6.1@-1278.28,1500 -1081.28,1500 -1053.65,1527.64 U1.4@-1019.28,1527.64 ; R6.1@1106.43,-630 1303.43,-630 1331.07,-602.36 U1.4@1365.43,-602.36 ; R6.1@1106.43,435 1303.43,435 1331.07,462.64 U1.4@1365.43,462.64 ; R6.1@1106.43,1500 1303.43,1500 1331.07,1527.64 U1.4@1365.43,1527.64
PWM: P2.3 R5.2 | length 3673.8
  Top Layer w12: P2.3@-1855,-445 -1617.28,-445 -1379.28,-683 R5.2@-1341.28,-683 ; P2.3@-1855,620 -1617.28,620 -1379.28,382 R5.2@-1341.28,382 ; P2.3@-1855,1685 -1617.28,1685 -1379.28,1447 R5.2@-1341.28,1447 ; P2.3@529.72,-445 767.43,-445 1005.43,-683 R5.2@1043.43,-683 ; P2.3@529.72,620 767.43,620 1005.43,382 R5.2@1043.43,382 ; P2.3@529.72,1685 767.43,1685 1005.43,1447 R5.2@1043.43,1447
VCC: C1.2 C2.2 C8.1 L1.1 P2.5 U1.1 U1.20
pads on no net: P1.0 P2.0 U1.5 U1.8 U1.19

## Polygon pours and split planes (outlines as drawn)
GND on Top Layer "GND_L01_P056" (solid, remove dead copper, pour order 56): -2490,2370 -2470,2390 305,2390 305,1200 205,1100 140,1035 -2425,1035
GND on Top Layer "GND_L01_P054" (solid, remove dead copper, pour order 54): -105.28,2370 -85.28,2390 2689.72,2390 2689.72,1200 2589.72,1100 2524.72,1035 -40.28,1035
GND on Top Layer "GND_L01_P048" (solid, remove dead copper, pour order 48): -2490,1305 -2470,1325 305,1325 305,135 205,35 140,-30 -2425,-30
GND on Top Layer "GND_L01_P046" (solid, remove dead copper, pour order 46): -105.28,1305 -85.28,1325 2689.72,1325 2689.72,135 2589.72,35 2524.72,-30 -40.28,-30
GND on Top Layer "GND_L01_P040" (solid, remove dead copper, pour order 40): -105.28,240 -85.28,260 2689.72,260 2689.72,-930 2589.72,-1030 2524.72,-1095 -40.28,-1095
GND on Top Layer "GND_L01_P036" (solid, remove dead copper, pour order 36): -2490,240 -2470,260 305,260 305,-930 205,-1030 140,-1095 -2425,-1095
GND on Bottom Layer "GND_L02_P052" (solid, remove dead copper, pour order 52): -2626,2358 263,2358 215,2310 215,971 -2343,971 -2431,1059
GND on Bottom Layer "GND_L02_P050" (solid, remove dead copper, pour order 50): -241.28,2358 2647.72,2358 2599.72,2310 2599.72,971 41.72,971 -46.28,1059
GND on Bottom Layer "GND_L02_P044" (solid, remove dead copper, pour order 44): -2626,1293 263,1293 215,1245 215,-94 -2343,-94 -2431,-6
GND on Bottom Layer "GND_L02_P042" (solid, remove dead copper, pour order 42): -241.28,1293 2647.72,1293 2599.72,1245 2599.72,-94 41.72,-94 -46.28,-6
GND on Bottom Layer "GND_L02_P038" (solid, remove dead copper, pour order 38): -241.28,228 2647.72,228 2599.72,180 2599.72,-1159 41.72,-1159 -46.28,-1071
GND on Bottom Layer "GND_L02_P028" (solid, remove dead copper, pour order 28): -2626,228 263,228 215,180 215,-1159 -2343,-1159 -2431,-1071

## Keep-outs
Keep-Out Layer:
  lines w10: -2267,-905.28 -2267,41.28 ; -2267,159.72 -2267,1106.28 ; -2267,1224.72 -2267,2171.28 ; -2266.72,-905.28 ccw(c-2207,-905.28) -2207,-965 58,-965 ccw(c58,-905.28) 117.72,-905.28 ; -2266.72,41.28 cw(c-2208,41.28) -2208,100 -1802.28,100 58,100 ; -2266.72,159.72 ccw(c-2207,159.72) -2207,100 58,100 ; -2266.72,1106.28 cw(c-2208,1106.28) -2208,1165 -1802.28,1165 58,1165 ; -2266.72,1224.72 ccw(c-2207,1224.72) -2207,1165 58,1165 ; -2266.72,2171.28 cw(c-2208,2171.28) -2208,2230 -1802.28,2230 58,2230 cw(c58,2170.28) 117.72,2170.28 117.72,1224.72 ; 117.72,41.28 117.72,-905.28 ; 117.72,1106.28 117.72,159.72 ; 117.72,2171.28 117.72,1224.72 ; 118,-905.28 ccw(c177.72,-905.28) 177.72,-965 2442.72,-965 ccw(c2442.72,-905.28) 2502.43,-905.28 2502.43,40.28 ccw(c2442.72,40.28) 2442.72,100 ; 118,41.28 cw(c176.72,41.28) 176.72,100 582.43,100 2442.72,100 ; 118,159.72 ccw(c177.72,159.72) 177.72,100 2442.72,100 ; 118,1106.28 cw(c176.72,1106.28) 176.72,1165 582.43,1165 2442.72,1165 ; 118,1224.72 ccw(c177.72,1224.72) 177.72,1165 2442.72,1165 ; 118,2171.28 cw(c176.72,2171.28) 176.72,2230 582.43,2230 2442.72,2230 cw(c2442.72,2170.28) 2502.43,2170.28 2502.43,1224.72 cw(c2442.72,1224.72) 2442.72,1165 ; 58,100 ccw(c58,159.72) 117.72,159.72 ; 58,100 cw(c58,40.28) 117.72,40.28 117.72,-905.28 ; 58,1165 ccw(c58,1224.72) 117.72,1224.72 ; 58,1165 cw(c58,1105.28) 117.72,1105.28 117.72,159.72 ; 2442.72,100 ccw(c2442.72,159.72) 2502.43,159.72 2502.43,1105.28 ccw(c2442.72,1105.28) 2442.72,1165

## Other copper
Top Layer:
  rectangle net GND: -915,1380 -860,1430
  rectangle net GND: -785,1335 -760,1375
  rectangle net GND: -1450,2010 -1410,2045
  rectangle net GND: -1945,1435 -1880,1640
  rectangle net NetC3_2: -175,1685 -60,1770
  rectangle net NetC3_2: -802.28,1940 -115,2075
  rectangle net NetD1_1: -902.28,1805 -682.28,1910
  rectangle net VCC: -1322.28,1745 -1002.28,1965
  rectangle net VCC: -1052.28,1597 -1002.28,1755
  rectangle net VCC: -1014.28,1597 -744.28,1648
  rectangle net VCC: -1990,1815 -1265,1960
  rectangle net GND: -580,1530 -560,1560
  rectangle net GND: 1804.72,1530 1824.72,1560
  rectangle net VCC: 394.72,1815 1119.72,1960
  rectangle net VCC: 1370.43,1597 1640.43,1648
  rectangle net VCC: 1332.43,1597 1382.43,1755
  rectangle net VCC: 1062.43,1745 1382.43,1965
  rectangle net NetD1_1: 1482.43,1805 1702.43,1910
  rectangle net NetC3_2: 1582.43,1940 2269.72,2075
  rectangle net NetC3_2: 2209.72,1685 2324.72,1770
  rectangle net GND: 439.72,1435 504.72,1640
  rectangle net GND: 934.72,2010 974.72,2045
  rectangle net GND: 1599.72,1335 1624.72,1375
  rectangle net GND: 1469.72,1380 1524.72,1430
  rectangle net GND: -915,315 -860,365
  rectangle net GND: -785,270 -760,310
  rectangle net GND: -1450,945 -1410,980
  rectangle net GND: -1945,370 -1880,575
  rectangle net NetC3_2: -175,620 -60,705
  rectangle net NetC3_2: -802.28,875 -115,1010
  rectangle net NetD1_1: -902.28,740 -682.28,845
  rectangle net VCC: -1322.28,680 -1002.28,900
  rectangle net VCC: -1052.28,532 -1002.28,690
  rectangle net VCC: -1014.28,532 -744.28,583
  rectangle net VCC: -1990,750 -1265,895
  rectangle net GND: -580,465 -560,495
  rectangle net GND: 1804.72,465 1824.72,495
  rectangle net VCC: 394.72,750 1119.72,895
  rectangle net VCC: 1370.43,532 1640.43,583
  rectangle net VCC: 1332.43,532 1382.43,690
  rectangle net VCC: 1062.43,680 1382.43,900
  rectangle net NetD1_1: 1482.43,740 1702.43,845
  rectangle net NetC3_2: 1582.43,875 2269.72,1010
  rectangle net NetC3_2: 2209.72,620 2324.72,705
  rectangle net GND: 439.72,370 504.72,575
  rectangle net GND: 934.72,945 974.72,980
  rectangle net GND: 1599.72,270 1624.72,310
  rectangle net GND: 1469.72,315 1524.72,365
  rectangle net GND: 1469.72,-750 1524.72,-700
  rectangle net GND: 1599.72,-795 1624.72,-755
  rectangle net GND: 934.72,-120 974.72,-85
  rectangle net GND: 439.72,-695 504.72,-490
  rectangle net NetC3_2: 2209.72,-445 2324.72,-360
  rectangle net NetC3_2: 1582.43,-190 2269.72,-55
  rectangle net NetD1_1: 1482.43,-325 1702.43,-220
  rectangle net VCC: 1062.43,-385 1382.43,-165
  rectangle net VCC: 1332.43,-533 1382.43,-375
  rectangle net VCC: 1370.43,-533 1640.43,-482
  rectangle net VCC: 394.72,-315 1119.72,-170
  rectangle net GND: 1804.72,-600 1824.72,-570
  rectangle net GND: -580,-600 -560,-570
  rectangle net VCC: -1990,-315 -1265,-170
  rectangle net VCC: -1014.28,-533 -744.28,-482
  rectangle net VCC: -1052.28,-533 -1002.28,-375
  rectangle net VCC: -1322.28,-385 -1002.28,-165
  rectangle net NetD1_1: -902.28,-325 -682.28,-220
  rectangle net NetC3_2: -802.28,-190 -115,-55
  rectangle net NetC3_2: -175,-445 -60,-360
  rectangle net GND: -1945,-695 -1880,-490
  rectangle net GND: -1450,-120 -1410,-85
  rectangle net GND: -785,-795 -760,-755
  rectangle net GND: -915,-750 -860,-700
  pour cut-out: -2005,1635 -2005,1485 -1825,1485 -1825,1635
  pour cut-out: -1225,1640 -1165,1640 -1165,1580 -1225,1580
  pour cut-out: -1225,1580 -1165,1580 -1165,1520 -1225,1520
  pour cut-out: -1230,1405 -1170,1405 -1170,1345 -1230,1345
  pour cut-out: -1049.61,1410 -965,1410 -965,1385 -965,1380 -970,1380 -1049.61,1380
  pour cut-out: -820,1390 -820,1356.38 -738.58,1356.38 -738.58,1388.58 -740,1390
  pour cut-out: -580,1820 -270,1820 -270,1920 -580,1920
  pour cut-out: -1440,2070 -1240,2070 -1240,2040 -1160,2040 -1160,1970 -1440,1970
  pour cut-out: -970,1590 -820,1590 -830,1420 -820,1410 -965,1410
  pour cut-out: -1255,1490 -1060,1490 -1040,1510 -1005,1475 -1250,1475 -1260,1465
  pour cut-out: 1129.72,1490 1324.72,1490 1344.72,1510 1379.72,1475 1134.72,1475 1124.72,1465
  pour cut-out: 1414.72,1590 1564.72,1590 1554.72,1420 1564.72,1410 1419.72,1410
  pour cut-out: 944.72,2070 1144.72,2070 1144.72,2040 1224.72,2040 1224.72,1970 944.72,1970
  pour cut-out: 1804.72,1820 2114.72,1820 2114.72,1920 1804.72,1920
  pour cut-out: 1564.72,1390 1564.72,1356.38 1646.13,1356.38 1646.13,1388.58 1644.72,1390
  pour cut-out: 1335.11,1410 1419.72,1410 1419.72,1385 1419.72,1380 1414.72,1380 1335.11,1380
  pour cut-out: 1154.72,1405 1214.72,1405 1214.72,1345 1154.72,1345
  pour cut-out: 1159.72,1580 1219.72,1580 1219.72,1520 1159.72,1520
  pour cut-out: 1159.72,1640 1219.72,1640 1219.72,1580 1159.72,1580
  pour cut-out: 379.72,1635 379.72,1485 559.72,1485 559.72,1635
  pour cut-out: -2005,570 -2005,420 -1825,420 -1825,570
  pour cut-out: -1225,575 -1165,575 -1165,515 -1225,515
  pour cut-out: -1225,515 -1165,515 -1165,455 -1225,455
  pour cut-out: -1230,340 -1170,340 -1170,280 -1230,280
  pour cut-out: -1049.61,345 -965,345 -965,320 -965,315 -970,315 -1049.61,315
  pour cut-out: -820,325 -820,291.38 -738.58,291.38 -738.58,323.58 -740,325
  pour cut-out: -580,755 -270,755 -270,855 -580,855
  pour cut-out: -1440,1005 -1240,1005 -1240,975 -1160,975 -1160,905 -1440,905
  pour cut-out: -970,525 -820,525 -830,355 -820,345 -965,345
  pour cut-out: -1255,425 -1060,425 -1040,445 -1005,410 -1250,410 -1260,400
  pour cut-out: 1129.72,425 1324.72,425 1344.72,445 1379.72,410 1134.72,410 1124.72,400
  pour cut-out: 1414.72,525 1564.72,525 1554.72,355 1564.72,345 1419.72,345
  pour cut-out: 944.72,1005 1144.72,1005 1144.72,975 1224.72,975 1224.72,905 944.72,905
  pour cut-out: 1804.72,755 2114.72,755 2114.72,855 1804.72,855
  pour cut-out: 1564.72,325 1564.72,291.38 1646.13,291.38 1646.13,323.58 1644.72,325
  pour cut-out: 1335.11,345 1419.72,345 1419.72,320 1419.72,315 1414.72,315 1335.11,315
  pour cut-out: 1154.72,340 1214.72,340 1214.72,280 1154.72,280
  pour cut-out: 1159.72,515 1219.72,515 1219.72,455 1159.72,455
  pour cut-out: 1159.72,575 1219.72,575 1219.72,515 1159.72,515
  pour cut-out: 379.72,570 379.72,420 559.72,420 559.72,570
  pour cut-out: 379.72,-495 379.72,-645 559.72,-645 559.72,-495
  pour cut-out: 1159.72,-490 1219.72,-490 1219.72,-550 1159.72,-550
  pour cut-out: 1159.72,-550 1219.72,-550 1219.72,-610 1159.72,-610
  pour cut-out: 1154.72,-725 1214.72,-725 1214.72,-785 1154.72,-785
  pour cut-out: 1335.11,-720 1419.72,-720 1419.72,-745 1419.72,-750 1414.72,-750 1335.11,-750
  pour cut-out: 1564.72,-740 1564.72,-773.62 1646.13,-773.62 1646.13,-741.42 1644.72,-740
  pour cut-out: 1804.72,-310 2114.72,-310 2114.72,-210 1804.72,-210
  pour cut-out: 944.72,-60 1144.72,-60 1144.72,-90 1224.72,-90 1224.72,-160 944.72,-160
  pour cut-out: 1414.72,-540 1564.72,-540 1554.72,-710 1564.72,-720 1419.72,-720
  pour cut-out: 1129.72,-640 1324.72,-640 1344.72,-620 1379.72,-655 1134.72,-655 1124.72,-665
  pour cut-out: -1255,-640 -1060,-640 -1040,-620 -1005,-655 -1250,-655 -1260,-665
  pour cut-out: -970,-540 -820,-540 -830,-710 -820,-720 -965,-720
  pour cut-out: -1440,-60 -1240,-60 -1240,-90 -1160,-90 -1160,-160 -1440,-160
  pour cut-out: -580,-310 -270,-310 -270,-210 -580,-210
  pour cut-out: -820,-740 -820,-773.62 -738.58,-773.62 -738.58,-741.42 -740,-740
  pour cut-out: -1049.61,-720 -965,-720 -965,-745 -965,-750 -970,-750 -1049.61,-750
  pour cut-out: -1230,-725 -1170,-725 -1170,-785 -1230,-785
  pour cut-out: -1225,-550 -1165,-550 -1165,-610 -1225,-610
  pour cut-out: -1225,-490 -1165,-490 -1165,-550 -1225,-550
  pour cut-out: -2005,-495 -2005,-645 -1825,-645 -1825,-495
Bottom Layer:
  rectangle net NetC3_2: -195,1685 -115,2070
  rectangle net GND: -2240,1200 -2040,1350
  rectangle net GND: -2210,1190 -2090,1220
  rectangle net GND: -100,1200 90,1360
  rectangle net GND: -80,1190 60,1210
  rectangle net GND: -90,2040 70,2210
  rectangle net GND: 60,2080 80,2180
  rectangle net GND: -2240,2040 -2040,2190
  rectangle net GND: -2210,2180 -2090,2210
  rectangle net GND: -980,1290 -740,1610
  rectangle net GND: 1404.72,1290 1644.72,1610
  rectangle net GND: 174.72,2180 294.72,2210
  rectangle net GND: 144.72,2040 344.72,2190
  rectangle net GND: 2444.72,2080 2464.72,2180
  rectangle net GND: 2294.72,2040 2454.72,2210
  rectangle net GND: 2304.72,1190 2444.72,1210
  rectangle net GND: 2284.72,1200 2474.72,1360
  rectangle net GND: 174.72,1190 294.72,1220
  rectangle net GND: 144.72,1200 344.72,1350
  rectangle net NetC3_2: 2189.72,1685 2269.72,2070
  rectangle net NetC3_2: -195,620 -115,1005
  rectangle net GND: -2240,135 -2040,285
  rectangle net GND: -2210,125 -2090,155
  rectangle net GND: -100,135 90,295
  rectangle net GND: -80,125 60,145
  rectangle net GND: -90,975 70,1145
  rectangle net GND: 60,1015 80,1115
  rectangle net GND: -2240,975 -2040,1125
  rectangle net GND: -2210,1115 -2090,1145
  rectangle net GND: -980,225 -740,545
  rectangle net GND: 1404.72,225 1644.72,545
  rectangle net GND: 174.72,1115 294.72,1145
  rectangle net GND: 144.72,975 344.72,1125
  rectangle net GND: 2444.72,1015 2464.72,1115
  rectangle net GND: 2294.72,975 2454.72,1145
  rectangle net GND: 2304.72,125 2444.72,145
  rectangle net GND: 2284.72,135 2474.72,295
  rectangle net GND: 174.72,125 294.72,155
  rectangle net GND: 144.72,135 344.72,285
  rectangle net NetC3_2: 2189.72,620 2269.72,1005
  rectangle net NetC3_2: 2189.72,-445 2269.72,-60
  rectangle net GND: 144.72,-930 344.72,-780
  rectangle net GND: 174.72,-940 294.72,-910
  rectangle net GND: 2284.72,-930 2474.72,-770
  rectangle net GND: 2304.72,-940 2444.72,-920
  rectangle net GND: 2294.72,-90 2454.72,80
  rectangle net GND: 2444.72,-50 2464.72,50
  rectangle net GND: 144.72,-90 344.72,60
  rectangle net GND: 174.72,50 294.72,80
  rectangle net GND: 1404.72,-840 1644.72,-520
  rectangle net GND: -980,-840 -740,-520
  rectangle net GND: -2210,50 -2090,80
  rectangle net GND: -2240,-90 -2040,60
  rectangle net GND: 60,-50 80,50
  rectangle net GND: -90,-90 70,80
  rectangle net GND: -80,-940 60,-920
  rectangle net GND: -100,-930 90,-770
  rectangle net GND: -2210,-940 -2090,-910
  rectangle net GND: -2240,-930 -2040,-780
  rectangle net NetC3_2: -195,-445 -115,-60

## Silkscreen, mask and mechanical layers (free items; w line width, h text height)
Top Overlay:
  text "RMXX" at -557,2121 h120
  text "RMXX" at 1827.72,2121 h120
  text "VC" at -1825,1820 h60
  text "VC" at 559.72,1820 h60
  text "EN" at -1820,1740 h60
  text "EN" at 564.72,1740 h60
  text "PW" at -1820,1665 h60
  text "PW" at 564.72,1665 h60
  text "GD" at -1820,1545 h60
  text "GD" at 564.72,1545 h60
  text "BG Board V1.3" at -1496,1201 h80
  text "BG Board V1.3" at 888.72,1201 h80
  text "RMXX" at -557,1056 h120
  text "RMXX" at 1827.72,1056 h120
  text "VC" at -1825,755 h60
  text "VC" at 559.72,755 h60
  text "EN" at -1820,675 h60
  text "EN" at 564.72,675 h60
  text "PW" at -1820,600 h60
  text "PW" at 564.72,600 h60
  text "GD" at -1820,480 h60
  text "GD" at 564.72,480 h60
  text "BG Board V1.3" at -1496,136 h80
  text "BG Board V1.3" at 888.72,136 h80
  text "RMXX" at -557,-9 h120
  text "RMXX" at 1827.72,-9 h120
  text "VC" at -1825,-310 h60
  text "VC" at 559.72,-310 h60
  text "EN" at -1820,-390 h60
  text "EN" at 564.72,-390 h60
  text "PW" at -1820,-465 h60
  text "PW" at 564.72,-465 h60
  text "GD" at -1820,-585 h60
  text "GD" at 564.72,-585 h60
  text "BG Board V1.3" at -1496,-929 h80
  text "BG Board V1.3" at 888.72,-929 h80